# Altium PCB PCB1.PcbDoc (part 1 of 2)
Units mm, origin at the board's own origin, x right, y up, seen from the top; angles counter-clockwise.
Board outline 143 x 70 mm, 2 copper layers (Top Layer, Bottom Layer); 99 components, 75 nets, 372 pads, 741 vias.
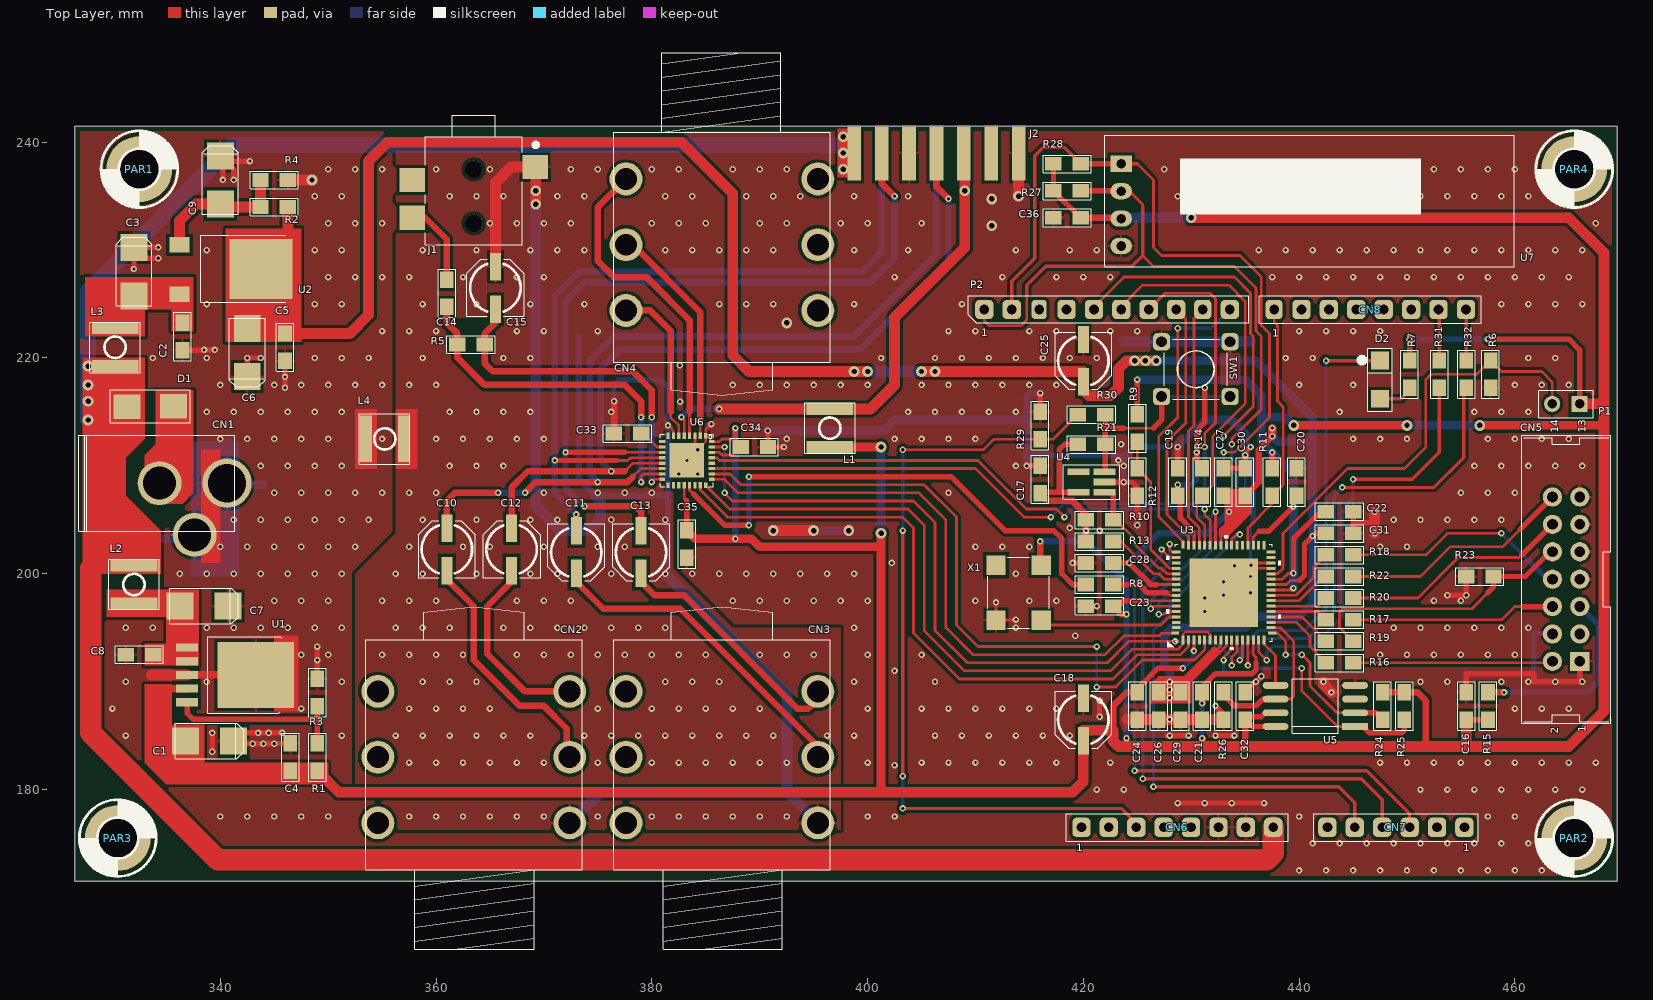
[diagram p0: Top Layer view]
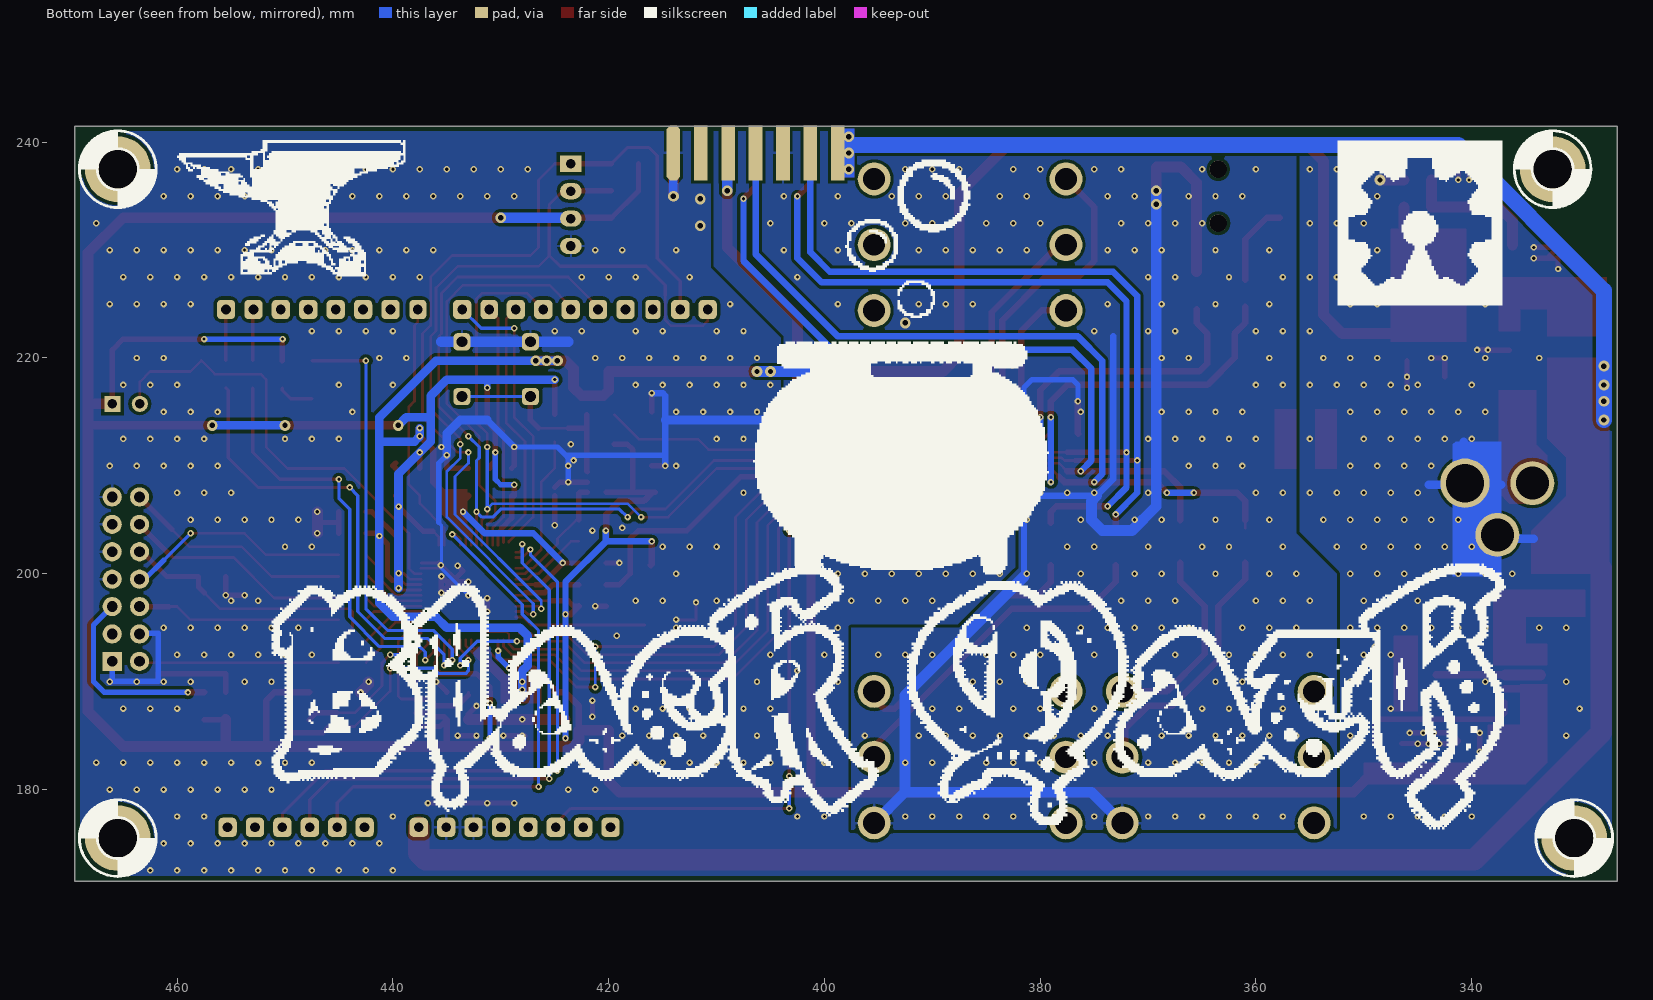
[diagram p1: Bottom Layer view, seen from below]

## Layer stack, top to bottom
Top Solder: solder mask 0.0102, Solder Resist, Dk 3.5
Top Layer: signal copper 0.0356
Dielectric 1: dielectric 0.32, FR-4, Dk 4.8
Bottom Layer: signal copper 0.0356
Bottom Solder: solder mask 0.0102, Solder Resist, Dk 3.5

## Board outline
326.5,171.5 326.5,241.5 469.5,241.5 469.5,171.5

## Design rules (kind name [scope] priority, off if disabled: settings)
Clearance [All] p1: gap=0.2 ignorepadtopadclearanceinfootprint=FALSE except(0: Arc-Hole Track-Hole SMDPad-Hole THPad-Hole Via-Hole Fill-Hole Poly-Hole Region-Hole Text-Hole; 0.3: Arc-Poly Track-Poly SMDPad-Poly THPad-Poly Via-Poly Fill-Poly Poly-Poly Poly-Region)
PolygonConnect via [IsVia] p1: connectstyle=Direct reliefconductorwidth=0.254 reliefentries=4 polygonreliefangle="90 Angle" airgapwidth=0.254
PolygonConnect [All] p2: connectstyle=Relief reliefconductorwidth=0.254 reliefentries=4 polygonreliefangle="90 Angle" airgapwidth=0.254
RoutingVias [All] p1: holewidth=0.3 width=0.6 viastyle="Through Hole" minholewidth=0.3 minwidth=0.6 maxholewidth=0.5 maxwidth=1
SolderMaskExpansion viasolder [IsVia] p1: expansion=-0.5
SolderMaskExpansion SolderMaskExpansion_1 [All] p2: expansion=0.102
Width [All] p1: maxlimit=2 minlimit=0.2 preferedwidth=0.6
30 further rules are at their usual default settings.

## Classes and differential pairs
component class "SPI FLASH": C32 R24 R25 R26 U5
component class "POWER SUPPLY": C1 C2 C3 C4 C5 C6 C7 C8 C9 CN1 D1 L1 L2 L3 L4 PAR1 PAR2 PAR3 PAR4 R1 R2 R3 R4 U1 U2
component class OLED: C36 R27 R28 U7
component class "Main Processor": C16 C17 C18 C19 C20 C21 C22 C23 C24 C25 C26 C27 C28 C29 C30 C31 CN5 D2 P1 R6 R7 R8 R9 R10 R11 R12 R13 R14 R15 R16 R17 R18 R19 R20 R21 R22 R23 SW1 U3 U4 X1
component class "AUDIO CONNECTORS": C10 C11 C12 C13 C14 C15 CN2 CN3 CN4 J1 J2 R5
component class "AUDIO CODEC": C33 C34 C35 U6
component class "Arduino Interface": CN6 CN7 CN8 P2 R29 R30 R31 R32

## Components (designator, comment, footprint, x,y, rotation, side; value= is the part's Value field where it differs from the comment)
C1 "10uF - 25V - 10% - SMD2412 - 5430" SMD2412-CAP 339,184.5 r0 top
C2 "Capacitor 100nF - 50V" SMD0805-CAP 336.5,222 r270 top
C3 "10uF - 25V - 10% - SMD2412 - 5430" SMD2412-CAP 332,228 r90 top
C4 "Capacitor 100nF - 50V" SMD0805-CAP 346.5,183 r90 top
C5 "Capacitor 100nF - 50V" SMD0805-CAP 346,221 r270 top
C6 "10uF - 25V - 10% - SMD2412 - 5430" SMD2412-CAP 342.5,220.5 r270 top
C7 "10uF - 25V - 10% - SMD2412 - 5430" SMD2412-CAP 338.5,197 r0 top
C8 "Capacitor 100nF - 50V" SMD0805-CAP 332.5,192.5 r180 top
C9 "10uF - 25V - 10% - SMD2412 - 5430" SMD2412-CAP 340,236.5 r90 top
C10 "Capacitor 1 uF - 10%" CAP/SMD/ELET/5MM/NP 361,202.25 r270 top
C11 "Capacitor 1 uF - 10%" CAP/SMD/ELET/5MM/NP 373,202 r90 top
C12 "Capacitor 1 uF - 10%" CAP/SMD/ELET/5MM/NP 367,202.25 r270 top
C13 "Capacitor 1 uF - 10%" CAP/SMD/ELET/5MM/NP 379,202 r90 top
C14 "Capacitor 100 nF - 10%" SMD0805-CAP 361,226 r270 top
C15 "Capacitor 1 uF - 10%" CAP/SMD/ELET/5MM/NP 365.5,226.5 r270 top
C16 "100nF 50V" SMD0805 455.5,187.75 r270 top
C17 "100nF 50V" SMD0805 416,208.75 r270 top
C18 "Capacitor 10 uF - 20%" CAP/SMD/ELET/5MM/NP 420,186.5 r90 top
C19 "Capacitor 100 nF - 10%" SMD0805-CAP 428.75,208.5 r270 top
C20 "Capacitor 100 nF - 10%" SMD0805-CAP 439.75,208.5 r90 top
C21 "Capacitor 100 nF - 10%" SMD0805-CAP 431,187.75 r270 top
C22 "Capacitor 100 nF - 10%" SMD0805-CAP 443.75,205.75 r180 top
C23 "Capacitor 100 nF - 10%" SMD0805-CAP 421.5,197 r0 top
C24 "Capacitor 100 nF - 10%" SMD0805-CAP 425,187.75 r90 top
C25 "Capacitor 10 uF - 20%" CAP/SMD/ELET/5MM/NP 420,219.75 r90 top
C26 "Capacitor 100 nF - 10%" SMD0805-CAP 427,187.75 r90 top
C27 "Capacitor 100 nF - 10%" SMD0805-CAP 433,208.5 r90 top
C28 "Capacitor 100 nF - 10%" SMD0805-CAP 421.5,201 r180 top
C29 "Capacitor 100 nF - 10%" SMD0805-CAP 429,187.75 r90 top
C30 "Capacitor 100 nF - 10%" SMD0805-CAP 435,208.5 r270 top
C31 "Capacitor 100 nF - 10%" SMD0805-CAP 443.75,203.75 r180 top
C32 "Capacitor 100 nF - 10%" SMD0805-CAP 435,187.75 r90 top
C33 "Capacitor 100 nF - 10%" SMD0805-CAP 377.75,213 r0 top
C34 "Capacitor 100 nF - 10%" SMD0805-CAP 389.5,211.75 r0 top
C35 "Capacitor 100 nF - 10%" SMD0805-CAP 383.25,202.75 r270 top
C36 "Capacitor 100 nF - 10%" SMD0805-CAP 418.5,233 r180 top
CN1 "Conector POWER JACK 2.5MM" RAPC712X 337.5,206 r270 top
CN2 "LINE IN" CNC/P10/.080 363.5,183 r270 top
CN3 "LINE OUT" CNC/P10/.080 386.5,183 r270 top
CN4 "HEADPHONES OUT" CNC/P10/.080 386.5,230.5 r90 top
CN5 "BLACKFIN JTAG" WALCON.100/IDSC14/W.325/14 464.75,199.5 r90 top
CN6 "Conector M HEADER, 180G, SIMPLES, 8P" BLKCON.100/MCS-8/W.100/8#1 428.712,176.495 r0 top
CN7 "Conector M HEADER, 180G, SIMPLES, 6P" BLKCON.100/MCS-6/W.100/6 448.972,176.495 r180 top
CN8 "Conector M HEADER, 180G, SIMPLES, 8P" BLKCON.100/MCS-8/W.100/8#2 446.572,224.495 r0 top
D1 "Diodo B2100-13-F (SMB)" SMB 333.5,215.5 r180 top
D2 "LED 2MM SMD AZUL" LED\SMD1206 447.5,218 r90 top
J1 "MJ1-2510-SMT" CUI_MJ1-2510-SMT 363.5,235.5 r270 top
J2 "BOARD SLOT CONNECTOR" SLOT_CONN_BOARD 414,239 r270 top
L1 "Indutor 10uH 710mA SMD" WE-TPC-S 396.5,213.5 r0 top
L2 "Indutor 10uH 710mA SMD" WE-TPC-S 332,199 r0 top
L3 "Indutor 10uH 710mA SMD" WE-TPC-S 330.25,221 r180 top
L4 "Indutor 10uH 710mA SMD" WE-TPC-S 355.25,212.5 r90 top
P1 "Header 2" HDR1X2 466,215.75 r180 top
P2 "Header 10" HD-RP-254P-1X10P 410.822,224.495 r0 top
PAR1 "Parafuso M3 - 1295" FURO/142/240/M4/CHASSI 332.5,237.5 r0 top
PAR2 "Parafuso M3 - 1295" FURO/142/240/M4/CHASSI 465.5,175.5 r0 top
PAR3 "Parafuso M3 - 1295" FURO/142/240/M4/CHASSI 330.5,175.5 r0 top
PAR4 "Parafuso M3 - 1295" FURO/142/240/M4/CHASSI 465.5,237.5 r0 top
R1 "649R- 1% - 0805 - 466" SMD0805 349,183 r270 top
R2 "220R - 1% - 0805 - 381" SMD0805 345,234 r0 top
R3 "220R - 1% - 0805 - 381" SMD0805 349,189 r270 top
R4 "10R - 1% - 0805 - 344" SMD0805 345,236.5 r180 top
R5 "2K2 - 5% - 0805 - 333" SMD0805 363.25,221.25 r0 top
R6 "10K - 5% - 0805 - 328" SMD0805 457.75,218.5 r90 top
R7 "2K2 - 5% - 0805 - 333" SMD0805 450.25,218.5 r90 top
R8 "33R - 1% - 0805 - 406" SMD0805 421.5,199 r180 top
R9 "100K - 5% - 0805 - 326" SMD0805 425,213.5 r90 top
R10 "10K - 5% - 0805 - 328" SMD0805 421.5,205 r180 top
R11 "4K7 - 1% - 0805 - 438" SMD0805 437.5,208.5 r90 top
R12 "30K- 1% - 0805 - 400" SMD0805 425,208.5 r90 top
R13 "10K - 5% - 0805 - 328" SMD0805 421.5,203 r180 top
R14 "4K7 - 1% - 0805 - 438" SMD0805 431,208.5 r90 top
R15 "4K7 - 1% - 0805 - 438" SMD0805 457.5,187.75 r270 top
R16 "100R 5%" SMD0805 443.75,191.75 r180 top
R17 "100R 5%" SMD0805 443.75,195.75 r180 top
R18 "100R 5%" SMD0805 443.75,201.75 r180 top
R19 "100R 5%" SMD0805 443.75,193.75 r180 top
R20 "100R 5%" SMD0805 443.75,197.75 r180 top
R21 "5K1 5%" SMD0805 420.75,212 r180 top
R22 "100R 5%" SMD0805 443.75,199.75 r180 top
R23 "4K7 - 1% - 0805 - 438" SMD0805 456.75,199.75 r0 top
R24 "10K - 5% - 0805 - 328" SMD0805 447.75,187.75 r90 top
R25 "10K - 5% - 0805 - 328" SMD0805 449.75,187.75 r90 top
R26 "10K - 5% - 0805 - 328" SMD0805 433,187.75 r90 top
R27 "10K - 5% - 0805 - 328" SMD0805 418.5,235.5 r180 top
R28 "10K - 5% - 0805 - 328" SMD0805 418.5,238 r180 top
R29 "2K - 1% - 0805 - 392" SMD0805 416,213.75 r90 top
R30 "4K7 - 1% - 0805 - 438" SMD0805 420.75,214.75 r180 top
R31 "0R - 5% - 0805 - 3365" SMD0805 453,218.5 r270 top
R32 "0R - 5% - 0805 - 3365" SMD0805 455.5,218.5 r270 top
SW1 "Switch TACT, 180G, 4 TERM, 6 X 6MM" SW/TACT 427.25,221.5 r0 top
U1 "CI LDFPT-TR" PPAK-5 341.5,190.5 r270 top
U2 "LM317MDT (TO252) 713" TO252 340,228.5 r0 top
U3 "ADSP-BF592" CP_64_4 433,198.25 r90 top locked
U4 "TPS3820-33" DBV.95M/5/WG3.00/L3.00 420.75,208.5 r180 top
U5 "AT25DF321A (EIAJ SOIC) 5219" BIQUAD.SOG.050/8/WG.325/L.200 441.5,187.75 r90 top
U6 "SGTL5000XNAA3" QFN50P500X500X100-33N_SGTL5000XNAA3(Primary) 383.25,210.5 r270 top
U7 "OLED128x32" OLEDGREATZT128x32 423.5,238 r0 top
X1 "Crystal 24.576MHZ" CRYSTAL/SMD/5X7 414,198.25 r270 top

## Footprints (in the part's own frame and the unit in brackets; to place one, negate y for a bottom-side part, rotate by r counter-clockwise, add the part's x,y. Pads: shape width x height; smd on the part's side, far side on the other; paste and mask are expansions set on the pad)
BIQUAD.SOG.050/8/WG.325/L.200 [mil]
  rect 25x94 smd: 1(-75,-145)
  oval 25x94 smd: 2(-25,-145) 3(25,-145) 4(75,-145) 5(75,145) 6(25,145) 7(-25,145) 8(-75,145)
  silkscreen extent -100,-84 100,84
BLKCON.100/MCS-6/W.100/6 [mm]
  rrect50% 1.7x1.8 hole 0.9: 1(-6.35,0) 2(-3.81,0) 3(-1.27,0) 4(1.27,0) 5(3.81,0) 6(6.35,0)
  silkscreen extent -7.62,-1.27 7.62,1.27
BLKCON.100/MCS-8/W.100/8#1 [mm]
  rrect50% 1.7x1.8 hole 0.9: 1(-8.89,0) 2(-6.35,0) 3(-3.81,0) 4(-1.27,0) 5(1.27,0) 6(3.81,0) 7(6.35,0) 8(8.89,0)
  silkscreen extent -10.29,-1.27 10.29,1.27
BLKCON.100/MCS-8/W.100/8#2 [mm]
  rrect50% 1.6x1.8 hole 0.9: 1(-8.89,0)
  rrect50% 1.7x1.8 hole 0.9: 2(-6.35,0) 3(-3.81,0) 4(-1.27,0) 5(1.27,0) 6(3.81,0) 7(6.35,0) 8(8.89,0)
  silkscreen extent -10.29,-1.27 10.29,1.27
CAP/SMD/ELET/5MM/NP [mil] "CAPACITOR ELETROLITICO 5mm D X 5.8mm L"
  rect 100x40 smd: 1(-77.5,0) 2(77.5,0)
  silkscreen extent -105,-104 103,104, body extent -116,-104 116,104, height 236
CNC/P10/.080 [mil]
  round 120 hole 80: 1(240,350) 2(240,-350) 3(0,350) 4(0,-350) 5(-240,350) 6(-240,-350)
  silkscreen extent -549,-395 701,395
CP_64_4 [mm]
  rect 0.8x0.28 smd mask+0.127: 1(-4.394,3.75) 2(-4.394,3.25) 3(-4.394,2.75) 4(-4.394,2.25) 5(-4.394,1.75) 6(-4.394,1.25) 7(-4.394,0.75) 8(-4.394,0.25) 9(-4.394,-0.25) 10(-4.394,-0.75) 11(-4.394,-1.25) 12(-4.394,-1.75) 13(-4.394,-2.25) 14(-4.394,-2.75) 15(-4.394,-3.25) 16(-4.394,-3.75) 33(4.394,-3.75) 34(4.394,-3.25) 35(4.394,-2.75) 36(4.394,-2.25) 37(4.394,-1.75) 38(4.394,-1.25) 39(4.394,-0.75) 40(4.394,-0.25) 41(4.394,0.25) 42(4.394,0.75) 43(4.394,1.25) 44(4.394,1.75) 45(4.394,2.25) 46(4.394,2.75) 47(4.394,3.25)
  rect 0.28x0.8 smd mask+0.127: 17(-3.75,-4.5) 18(-3.25,-4.394) 19(-2.75,-4.394) 20(-2.25,-4.394) 21(-1.75,-4.394) 22(-1.25,-4.394) 23(-0.75,-4.394) 24(-0.25,-4.394) 25(0.25,-4.394) 26(0.75,-4.394) 27(1.25,-4.394) 28(1.75,-4.394) 29(2.25,-4.394) 30(2.75,-4.394) 31(3.25,-4.394) 32(3.75,-4.394) 49(3.75,4.394) 50(3.25,4.394) 51(2.75,4.394) 52(2.25,4.394) 53(1.75,4.394) 54(1.25,4.394) 55(0.75,4.394) 56(0.25,4.394) 57(-0.25,4.394) 58(-0.75,4.394) 59(-1.25,4.394) 60(-1.75,4.394) 61(-2.25,4.394) 62(-2.75,4.394) 63(-3.25,4.394)
  rect 0.7x0.28 smd mask+0.127: 48(4.45,3.75)
  rect 0.28x0.7 smd mask+0.127: 64(-3.75,4.5)
  rect 6.35x6.35 smd mask-3.162: 65(0,0)
  silkscreen extent -5.31,-5.31 5.31,5.31, body extent 0,0 0.25,0.25, height 0.25
CRYSTAL/SMD/5X7 [mil]
  rect 71x71 smd: 1(-100,-82.5) 2(100,-82.5) 3(100,82.5) 4(-100,82.5)
  silkscreen extent -130,-113 130,112
CUI_MJ1-2510-SMT [mm]
  rect 2.25x2.4 smd: 1(-2.2,5.7) 2(2.5,-5.7) 3(-1,-5.7)
  round 1.6 hole 1.6 unplated: None(-2,0) None(3,0)
  silkscreen extent -7,-4.5 5,5.95
DBV.95M/5/WG3.00/L3.00 [mil]
  rect 80x25 smd: 1(-47.5,37.4) 2(-47.5,0) 3(-47.5,-37.4) 4(47.5,-37.4) 5(47.5,37.4)
  silkscreen extent -104,-63 103,63
FURO/142/240/M4/CHASSI [mil]
  round 240 hole 142: 1(0,0)
  silkscreen extent -140,-140 141,141
HD-RP-254P-1X10P [mm] "HD-RP-254P-1X10P"
  rrect50% 1.7x1.8 hole 0.9: 1(0,0) 2(2.54,0) 4(7.62,0) 5(10.16,0) 6(12.7,0) 7(15.24,0) 8(17.78,0) 10(22.75,0)
  rrect50% 1.4x1.8 hole 0.9: 3(5.08,0)
  rrect50% 1.6x1.8 hole 0.9: 9(20.25,0)
  silkscreen extent -1.5,-1.25 24.5,1.27, body extent -1.5,-1.21 24.41,1.21, height 8.51
HDR1X2 [mm] "Connector; Header; 2 Position"
  rect 1.5x1.5 hole 0.9: 1(0,0)
  round 1.5 hole 0.9: 2(2.54,0)
  silkscreen extent -1.27,-1.27 3.81,1.27
LED\SMD1206 [mil]
  rect 65x65 smd: 1(-70,0) 2(70,0)
  silkscreen extent -115,-45 115,86
OLEDGREATZT128x32 [mm]
  rect 2x1.5 hole 0.9: 1(0,0)
  oval 2x1.5 hole 0.9: 2(0,-2.54) 3(0,-5.08) 4(0,-7.62)
  silkscreen extent -1.52,-9.53 36.45,2.67
PPAK-5 [mil]
  rect 30x80 smd: 1(-105,-180) 2(-55,-180) 3(-5,-180) 4(45,-180) 5(95,-180)
  rect 240x280 smd: 6(-5,70)
  silkscreen extent -145,-105 135,165, body extent -134,-186 124,100, height 75
QFN50P500X500X100-33N_SGTL5000XNAA3(Primary) [mm]
  rect 0.5x0.3 smd: 1(-2.3,1.75) 17(2.3,-1.75) 24(2.3,1.75)
  rect 0.6x0.3 smd: 2(-2.3,1.25) 3(-2.3,0.75) 4(-2.3,0.25) 5(-2.3,-0.25) 6(-2.3,-0.75) 7(-2.3,-1.25) 8(-2.3,-1.75) 18(2.3,-1.25) 19(2.3,-0.75) 20(2.3,-0.25) 21(2.3,0.25) 22(2.3,0.75) 23(2.3,1.25)
  rect 0.3x0.6 smd: 9(-1.75,-2.3) 10(-1.25,-2.3) 11(-0.75,-2.3) 12(-0.25,-2.3) 13(0.25,-2.3) 14(0.75,-2.3) 15(1.25,-2.3) 26(1.25,2.3) 27(0.75,2.3) 28(0.25,2.3) 29(-0.25,2.3) 30(-0.75,2.3) 31(-1.25,2.3)
  rect 0.3x0.5 smd: 16(1.75,-2.3) 25(1.75,2.3) 32(-1.75,2.3)
  rect 3.2x3.2 smd: EXP(0,0)
  silkscreen extent -2.45,-2.45 2.45,2.45
RAPC712X [mil]
  round 180 hole 140: 1(-94.5,123)
  round 160 hole 120: 2(-94.5,-123) 3(94.5,5)
  silkscreen extent -269,-418 81,152
SLOT_CONN_BOARD [mm]
  oct 5.08x1.27 smd far side: 1(0,0)
  rect 5.08x1.27 smd: 2(0,0) 4(0,-2.54) 6(0,-5.08) 8(0,-7.62) 10(0,-10.16) 12(0,-12.7) 14(0,-15.24)
  rect 5.08x1.27 smd far side: 3(0,-2.54) 5(0,-5.08) 7(0,-7.62) 9(0,-10.16) 11(0,-12.7) 13(0,-15.24)
SMB [mil]
  rect 98.4x90.53 smd: 1(-85,-1) 2(85,1)
  silkscreen extent -147,-61 146,60
SMD0805 [mil]
  rect 60x50 smd: 1(-50,0) 2(50,0)
  silkscreen extent -88,-32 88,32
SMD0805-CAP [mil] "Chip Capacitor 0805"
  rect 60x50 smd: 1(-50,0) 2(50,0)
  silkscreen extent -88,-32 88,32, body extent -39,-25 39,25, height 23
SMD2412-CAP [mm]
  rect 2.5x2.5 smd: 1(-2.235,0) 2(2.235,0)
  silkscreen extent -3.17,-1.65 3.17,1.65, body extent -1.75,-1.4 1.75,1.4, height 1.91
SW/TACT [mm]
  rrect50% 1.6x1.6 hole 1: 1(0,0) 2(6.35,0) 3(0,-5.08) 4(6.35,-5.08)
  silkscreen extent 0.25,-5.33 6.1,0.25
TO252 [mil]
  rect 72x56 smd: 1(-149,-102) 2(-149,78)
  rect 230x220 smd: 3(149,-10)
  silkscreen extent -71,-132 239,113, body extent -164,-145 234,121, height 93
WALCON.100/IDSC14/W.325/14 [mil]
  rect 70x70 hole 39: 1(-300,-50)
  round 70 hole 39: 2(-300,50) 3(-200,-50) 4(-200,50) 5(-100,-50) 6(-100,50) 7(0,-50) 8(0,50) 9(100,-50) 10(100,50) 11(200,-50) 12(200,50) 13(300,-50) 14(300,50)
  silkscreen extent -525,-163 525,163
WE-TPC-S [mil]
  rect 170x45 smd: 1(0,-70) 2(0,70)
  silkscreen extent -92,-91 92,93

## Part data
C1 C3 C6 C7 C9: "Capacitor 10uF, SDM TANTALUM"
C2 C4 C5 C8: "Capacitor 100nF, SMD 0805"
C10 C11 C12 C13 C15: library part "1uF - 50V - 10% - 0805 - 3296", "Capacitor 1uF, 10%, SMD 0805"
C14 C19 C20 C21 C22 C23 C24 C26 C27 C28 C29 C30 C31 C32 C33 C34 C35 C36: library part "100nF - 50V - 10% - 0805 - 580", "Capacitor 100nF, 10%, SMD 0805"
C16 C17: library part "100nF 50V Z 0805 CCM 1760"
C18 C25: library part "10uF - 16V - 20% - 5x11 - 3052", "Capacitor 10uF, 20%, SMD 0805 5mm D x 5.8mm L"
CN1: library part "CNC POWER JACK 2.5MM - 4414"
CN2 CN3 CN4: library part "CNC JACK P10 ST P/ PCI, HORIZ, TP - 749", "Conector JACK P10 ST P/ PC"
CN5: library part "IDC BOX HEADER 14P 762"
CN6 CN8: library part "CNC M HEADER, 180G, SIMPLES, 8P - 786"
CN7: library part "CNC M HEADER, 180G, SIMPLES, 6P - 785"
D2: library part "LED 2MM SMD1206 AZUL - 3220"
J2: library part SLOT_MACHO, "Conector de expansão colocado na borda da placa"
L1 L2 L3 L4: library part "10uH - 710mA - SMD - 3058"
P1: "Header, 2-Pin"
P2: "Header, 10-Pin"
PAR1 PAR2 PAR3 PAR4: "Parafuso M3"
R1: library part "649R - 1% - 0805 - 466", "Resistor 649R, 1%, SMD 0805"
R2 R3: "Resistor 220R, 1%, SMD 0805"
R4: "Resistor 10R, 1%, SMD 0805"
R5 R7: "Resistor 2K2, 5%, SMD 0805"
R6 R10 R13 R24 R25 R26 R27 R28: "Resistor 10K, 5%, SMD 0805"
R8: "Resistor 33R 1%, SMD 0805"
R9: "Resistor 100K, 5%, SMD 0805"
R11 R14 R15 R23 R30: "Resistor 4K7, 1%, SMD 0805"
R12: library part "30K - 1% - 0805 - 401", "Resistor 30K, 1%, SMD 0805"
R16 R17 R18 R19 R20 R22: library part "100R 5% 0805 327"
R21: library part "5K1 5% 0805 1368"
R29: "Resistor 2K, 1%, SMD 0805"
R31 R32: "Resistor 0R, 5%, SMD 0805"
SW1: library part "Switch TACT 9.5mm - 1224"
U2: "CI LM317MDT"
U3: library part ADSP-BF592BCPZ, "Imported"
U4: library part "TPS3820-33 (SOT23) 3494"
U5: "CI AT25DF321A"
U6: "Audio Codec , Ultra Low-Power, 4 mw for DAC-to-HP, 98 dB SNR and -80 dB THD+N, QFN 32, Tray"
X1: library part "Crystal 24.576MHZ 20PPM SMD - 3063"

## Via types
v1: diameter 0.6, hole 0.3, Top Layer to Bottom Layer, tented both sides, 545 vias
v2: diameter 0.6, hole 0.3, Top Layer to Bottom Layer, 165 vias
v3: diameter 1, hole 0.5, Top Layer to Bottom Layer, 31 vias

## Nets (pads, with @x,y where several pads share a name; then routed paths per layer and width w, separated by ;. In a path a pad name is that pad's centre, name@x,y a point inside that pad or via, vN(x,y) a via of type N, cw(c..) or ccw(c..) an arc to the next point about the centre after c; other vN are vias at no path point)
+VIN: CN6.8 D1.2 J2.13 J2.14 L2.2 L3.2 | length 227.1
  Top Layer w1: v3(397.75,240.5) 398.75,240.5 398.76,240.49 J2.14@398.76,239
  Top Layer w2: 329.5,202 328,200.5 328,185.25 339.75,173.5 437,173.5 437.602,174.102 CN6.8@437.602,176.495
  Bottom Layer w1: v3(397.75,240.5) 398.75,240.5 398.76,240.49 J2.13@398.76,239
  Bottom Layer w1.5: v3(327.75,214.25) v3(327.75,216) v3(327.75,217.5) v3(327.75,219.25) 327.75,226.25 341.25,239.75 397.75,239.75
  other v3: 397.75,237.5 397.75,239
A3V3: J2.5 J2.6 L1.2 U6.5 | length 50.6
  Top Layer w0.25: v2(382.75,214.5) 383,214.25 U6.5@383,212.8
  Top Layer w1: v2(386.25,215.278) L1.2@396.5,215.278 400.278,215.278 402.5,217.5 402.5,223.75 409,230.25 v3(409,235.5) 409,238.92 J2.6@408.92,239
  Bottom Layer w0.6: v2(382.75,214.5) 383.528,215.278 v2(386.25,215.278)
  Bottom Layer w1: J2.5@408.92,239 409,238.92 v3(409,235.5)
AGND: C15.1 C33.1 CN2.1 CN3.1 J1.1 J2.9 J2.10 L4.1 U6.7 | length 155.8
  Top Layer w0.25: v2(381.5,213.75) 382,213.25 U6.7@382,212.8
  Top Layer w0.6: C33.1@376.48,213 376.5,213.02 v2(376.5,216)
  Top Layer w1: C15.1@365.5,228 365.5,236.25 366.95,237.7 J1.1@369.2,237.7 369.25,237.65 v3(369.25,235.5) v3(369.25,234.25)
  Bottom Layer w0.5: v2(376.5,216) 376.5,217.5 377,218 380.75,218 381.5,217.25 v2(381.5,213.75)
  Bottom Layer w0.6: 373.25,222 373.25,208.75 374.75,207.25 381.5,207.25 ; 381.5,199.75 v2(381.5,213.75)
  Bottom Layer w1: v3(369.25,235.5) v3(369.25,234.25) 369.25,206.25 371.5,204 374.25,204 375.25,205 375.25,206.75 374.75,207.25 ; CN2.1@372.39,176.904 375.236,179.75 392.544,179.75 ; 381.5,199.75 392.544,188.706 392.544,179.75 ; CN3.1@395.39,176.904 392.544,179.75
  other v1: 357.5,177.5 360,177.5 362.5,177.5 365,177.5 367.5,177.5 370,177.5 375,177.5 380,177.5 382.5,177.5 385,177.5 387.5,177.5 390,177.5 392.5,177.5 357.5,182.5 360,182.5 362.5,182.5 365,182.5 367.5,182.5 370,182.5 375,182.5 380,182.5 382.5,182.5 385,182.5 387.5,182.5 390,182.5 392.5,182.5 356.25,185 358.75,185 361.25,185 363.75,185 366.25,185 368.75,185 373.75,185 376.25,185 378.75,185 381.25,185 383.75,185 386.25,185 388.75,185 391.25,185 396.25,185 357.5,187.5 360,187.5 362.5,187.5 365,187.5 375,187.5 380,187.5 382.5,187.5 385,187.5 387.5,187.5 390,187.5 358.75,190 361.25,190 363.75,190 381.25,190 383.75,190 386.25,190 355,192.5 357.5,192.5 360,192.5 362.5,192.5 367.5,192.5 370,192.5 372.5,192.5 375,192.5 377.5,192.5 380,192.5 382.5,192.5 385,192.5 390,192.5 392.5,192.5 395,192.5 356.25,195 358.75,195 361.25,195 366.25,195 368.75,195 371.25,195 373.75,195 376.25,195 378.75,195 381.25,195 355,197.5 357.5,197.5 360,197.5 367.5,197.5 370,197.5 372.5,197.5 356.25,200 358.75,200 363.75,200 368.75,200 371.25,200 376.25,200 381.25,200 357.5,202.5 362.5,202.5 365,202.5 370,202.5 375,202.5 377.5,202.5 358.75,205 363.75,205 368.75,205 371.25,205 376.25,205 381.25,205 357.5,207.5 360,207.5 370,207.5 375,207.5 377.5,207.5 380,207.5 361.25,210 363.75,210 366.25,210 360,212.5 362.5,212.5 365,212.5 367.5,212.5 370,212.5 361.25,215 363.75,215 366.25,215 368.75,215 376.25,215 357.5,217.5 360,217.5 387.5,217.5 390,217.5 392.5,217.5 395,217.5 397.5,217.5 400,217.5 358.75,220 366.25,220 368.75,220 401.25,220 357.5,222.5 360,222.5 367.5,222.5 370,222.5 375,222.5 358.75,225 363.75,225 368.75,225 373.75,225 386.25,225 388.75,225 391.25,225 398.75,225 357.5,227.5 362.5,227.5 367.5,227.5 370,227.5 402.5,227.5 358.75,230 363.75,230 368.75,230 371.25,230 373.75,230 381.25,230 383.75,230 386.25,230 388.75,230 391.25,230 398.75,230 403.75,230 365,232.5 367.5,232.5 370,232.5 372.5,232.5 380,232.5 382.5,232.5 385,232.5 390,232.5 392.5,232.5 397.5,232.5 400,232.5 405,232.5 361.25,235 363.75,235 366.25,235 371.25,235 373.75,235 381.25,235 383.75,235 388.75,235 391.25,235 393.75,235 398.75,235 403.75,235 360,237.5 365,237.5 372.5,237.5 375,237.5 380,237.5 382.5,237.5 387.5,237.5 390,237.5 392.5,237.5
  other v2: 382.625,215.95 382.6,219.325
  other v3: 392.5,223.25
BF_EMU: CN5.2 R16.1 | length 18.5
  Top Layer w0.25: R16.1@445.02,191.75 463.35,191.75 CN5.2@463.48,191.88
BF_TCK: CN5.8 R18.1 | length 21
  Top Layer w0.25: R18.1@445.02,201.75 451.75,201.75 453.75,203.75 v2(458.75,203.75)
  Bottom Layer w0.3: v2(458.75,203.75) 461.25,201.25
  Bottom Layer w0.5: 461.25,201.25 463,199.5 CN5.8@463.48,199.5
BF_TDI: CN5.12 R20.1 | length 21.3
  Top Layer w0.25: R20.1@445.02,197.75 451,197.75 454.75,201.5 460.4,201.5 460.65,201.75
  Top Layer w0.5: 460.65,201.75 CN5.12@463.48,204.58
BF_TDO: CN5.14 R22.1 | length 21.5
  Top Layer w0.25: R22.1@445.02,199.75 451.25,199.75 454,202.5 458.86,202.5 460.5,204.14
  Top Layer w0.5: 460.5,204.14 CN5.14@463.48,207.12
BF_TMS: CN5.6 R17.1 | length 19
  Top Layer w0.25: R17.1@445.02,195.75 458.79,195.75 460,196.96 460.75,196.96
  Top Layer w0.5: 460.75,196.96 CN5.6@463.48,196.96
BF_TRST: CN5.10 R19.1 R23.2 | length 26.2
  Top Layer w0.25: R19.1@445.02,193.75 443.75,195.02 443.75,196.5 444,196.75 456,196.75 457.76,198.51
  Top Layer w0.5: 457.5,198.25 458.02,198.77 R23.2@458.02,199.75 460.96,199.75 463.25,202.04 CN5.10@463.48,202.04
D3V3: C1.1 C4.1 C16.2 C17.2 C18.1 C19.2 C20.1 C21.1 C22.2 C23.2 C24.2 C32.1 C34.1 C35.1 C36.1 L1.1 P1.1 R1.2 R7.2 R9.2 R10.2 R11.2 R13.2 R14.2 R15.2 R21.2 R24.2 R25.2 R27.2 R28.2 U1.4 U3.3 U3.14 U3.25 U3.27 U3.35 U3.46 U3.58 U4.5 U5.7 U5.8 U6.20 U6.30 U6.32 U7.3 X1.4 | length 542
  Top Layer w0.25: U6.20@383,208.2 383,207 383.25,206.75 ; U6.30@385.55,211.25 386.25,211.25 386.5,211 387.48,211 C34.1@388.23,211.75 387.75,212.23 387.48,212.5 386.5,212.5 386.25,212.25 386,212.25 U6.32@385.55,212.25 ; 424.75,197.5 U3.58@428.606,197.5 ; 429.9,204.25 430.25,203.9 U3.46@430.25,202.644 ; v2(430.25,192.85) U3.3@430.25,193.856 ; U3.14@435.75,193.856 435.75,192.5 436,192.25 436,191.75 ; U3.35@435.75,202.644 435.75,203.4 436.3,203.95 ; U3.25@437.394,198.5 439.3,198.5 v2(439.475,198.675) ; U3.27@437.394,199.5 438.45,199.5 439,200.05 v2(439.475,200.05)
  Top Layer w0.5: C35.1@383.25,204.02 383.25,206.75 ; C34.1@387.75,212.23 v2(387.75,213.5) ; C17.2@415.68,207.55 417.75,207.55 ; R28.2@417.23,238 R27.2@417.23,235.5 419.73,233 C36.1@419.77,233 ; R21.2@419.48,212 418.25,212 417.75,211.5 417.75,207.55 ; U4.5@420.23,207.55 U4.5@419.543,207.55 417.75,207.55 ; C23.2@422.77,197 423.25,197 423.75,197.5 425.5,197.5 ; U7.3@423.42,233 U7.3@423.5,232.92 ; C24.2@425,189.02 425,189.325 426.925,191.25 v2(429.225,191.25) ; R9.2@425,214.77 v2(425,218) ; C19.2@428.75,207.23 v2(428.75,208.25) ; C19.2@429,207.23 429,205.15 429.9,204.25 ; C21.1@431,189.02 431,189.5 432.25,190.75 435.65,190.75 436,191.1 436,191.75 ; R14.2@431,209.77 431,210 430.5,210.5 v2(430.5,211.25) 430.5,213.25 431.25,214 v2(431.25,217.25) ; 436.3,203.95 437.2,203.95 v2(439.475,206.225) 439.475,206.955 C20.1@439.75,207.23 ; R11.2@437.5,209.77 v2(437.5,211.25) ; U5.8@437.817,185.845 435.635,185.845 C32.1@435,186.48 435.27,186.75 436.5,186.75 436.865,187.115 U5.7@437.817,187.115 ; v2(439.475,200.05) 439.475,203.25 441.975,205.75 C22.2@442.48,205.75 ; v2(450.23,221.75) 450.25,221.73 R7.2@450.25,219.75 ; C16.2@455.5,186.48 R15.2@457.5,186.48 ; v2(457.5,221.75) 465,221.75 466,220.75 P1.1@466,215.75
  Top Layer w0.6: v2(416,203) 416,200.885 X1.4@416.096,200.79 ; C17.2@416,207.48 416.73,206.75 419,206.75 420.23,205.52 R10.2@420.23,205 R13.2@420.23,203 ; C36.1@419.77,233 U7.3@423.42,233 ; 422.75,185.5 422.75,187.75 424.02,189.02 C24.2@425,189.02 ; C23.2@422.77,197 423.52,196.25 v2(424,196.25) ; 424,184 v2(424,184.75) ; 431,184 v2(431,184.75) ; v2(431,188) C21.1@431,189.02 ; 435,184 C32.1@435,186.48 ; R24.2@447.75,189.02 R25.2@449.75,189.02 450.98,189.02 451.75,188.25 451.75,184
  Top Layer w0.7: 333.857,189.357 U1.4@336.928,189.357
  Top Layer w0.8: C35.1@383.25,204.02 384.02,203.25 v2(387.75,203.25) 389.25,203.25 390,202.5 401.25,202.5 ; L1.1@396.5,211.722 396.528,211.75 v3(401.25,211.75) ; 401.25,179.75 401.25,202.5 ; v3(401.25,203.75) 401.25,202.5 ; v3(439.5,213.75) v3(450,213.75) ; v3(456.75,213.75) 468.25,213.75
  Top Layer w1: R1.2@349,181.73 350.98,179.75 401.25,179.75 419,179.75 420,180.75 C18.1@420,184.532 420,185.5 422.75,185.5 422.75,184.5 423.25,184 424,184 431,184 435,184 451.75,184 455.5,184 ; v3(430,233) 465,233 468.25,229.75 468.25,215.75 ; C16.2@455.5,186.48 455.5,184 ; P1.1@466,215.75 468.25,215.75 ; 455.5,184 465,184 468.25,187.25 468.25,213.75 468.25,215.75
  Bottom Layer w0.5: v2(428.75,208.25) 430,208.25 430.5,208.75 v2(430.5,211.25) ; v2(429.225,191.25) 430.25,192.275 v2(430.25,192.85) ; v2(431,184.75) v2(431,188) ; v2(450.23,221.75) v2(457.5,221.75)
  Bottom Layer w0.6: v2(387.75,203.25) v2(387.75,213.5) ; v2(416,203) 420.25,203 ; v2(420.25,204) 420.25,203 ; v2(424,184.75) v2(424,196.25) 424,199.25 420.25,203 ; v2(431.25,217.25) 431.25,218
  Bottom Layer w0.8: v3(401.25,203.75) v3(401.25,211.75) ; v2(425,218) 431.25,218 435,218 436.5,216.5 436.5,213.75 ; v2(439.475,198.675) v2(439.475,200.05) v2(439.475,206.225) 439.475,209.275 v2(437.5,211.25) 436.5,212.25 436.5,214.25 436.75,214.5 438.75,214.5 v3(439.5,213.75) ; v3(450,213.75) v3(456.75,213.75)
  Bottom Layer w1: U7.3@423.5,232.92 423.58,233 v3(430,233)